# EAGLE board TekDAQC_RevC (EAGLE 6.2), part 1 of 4
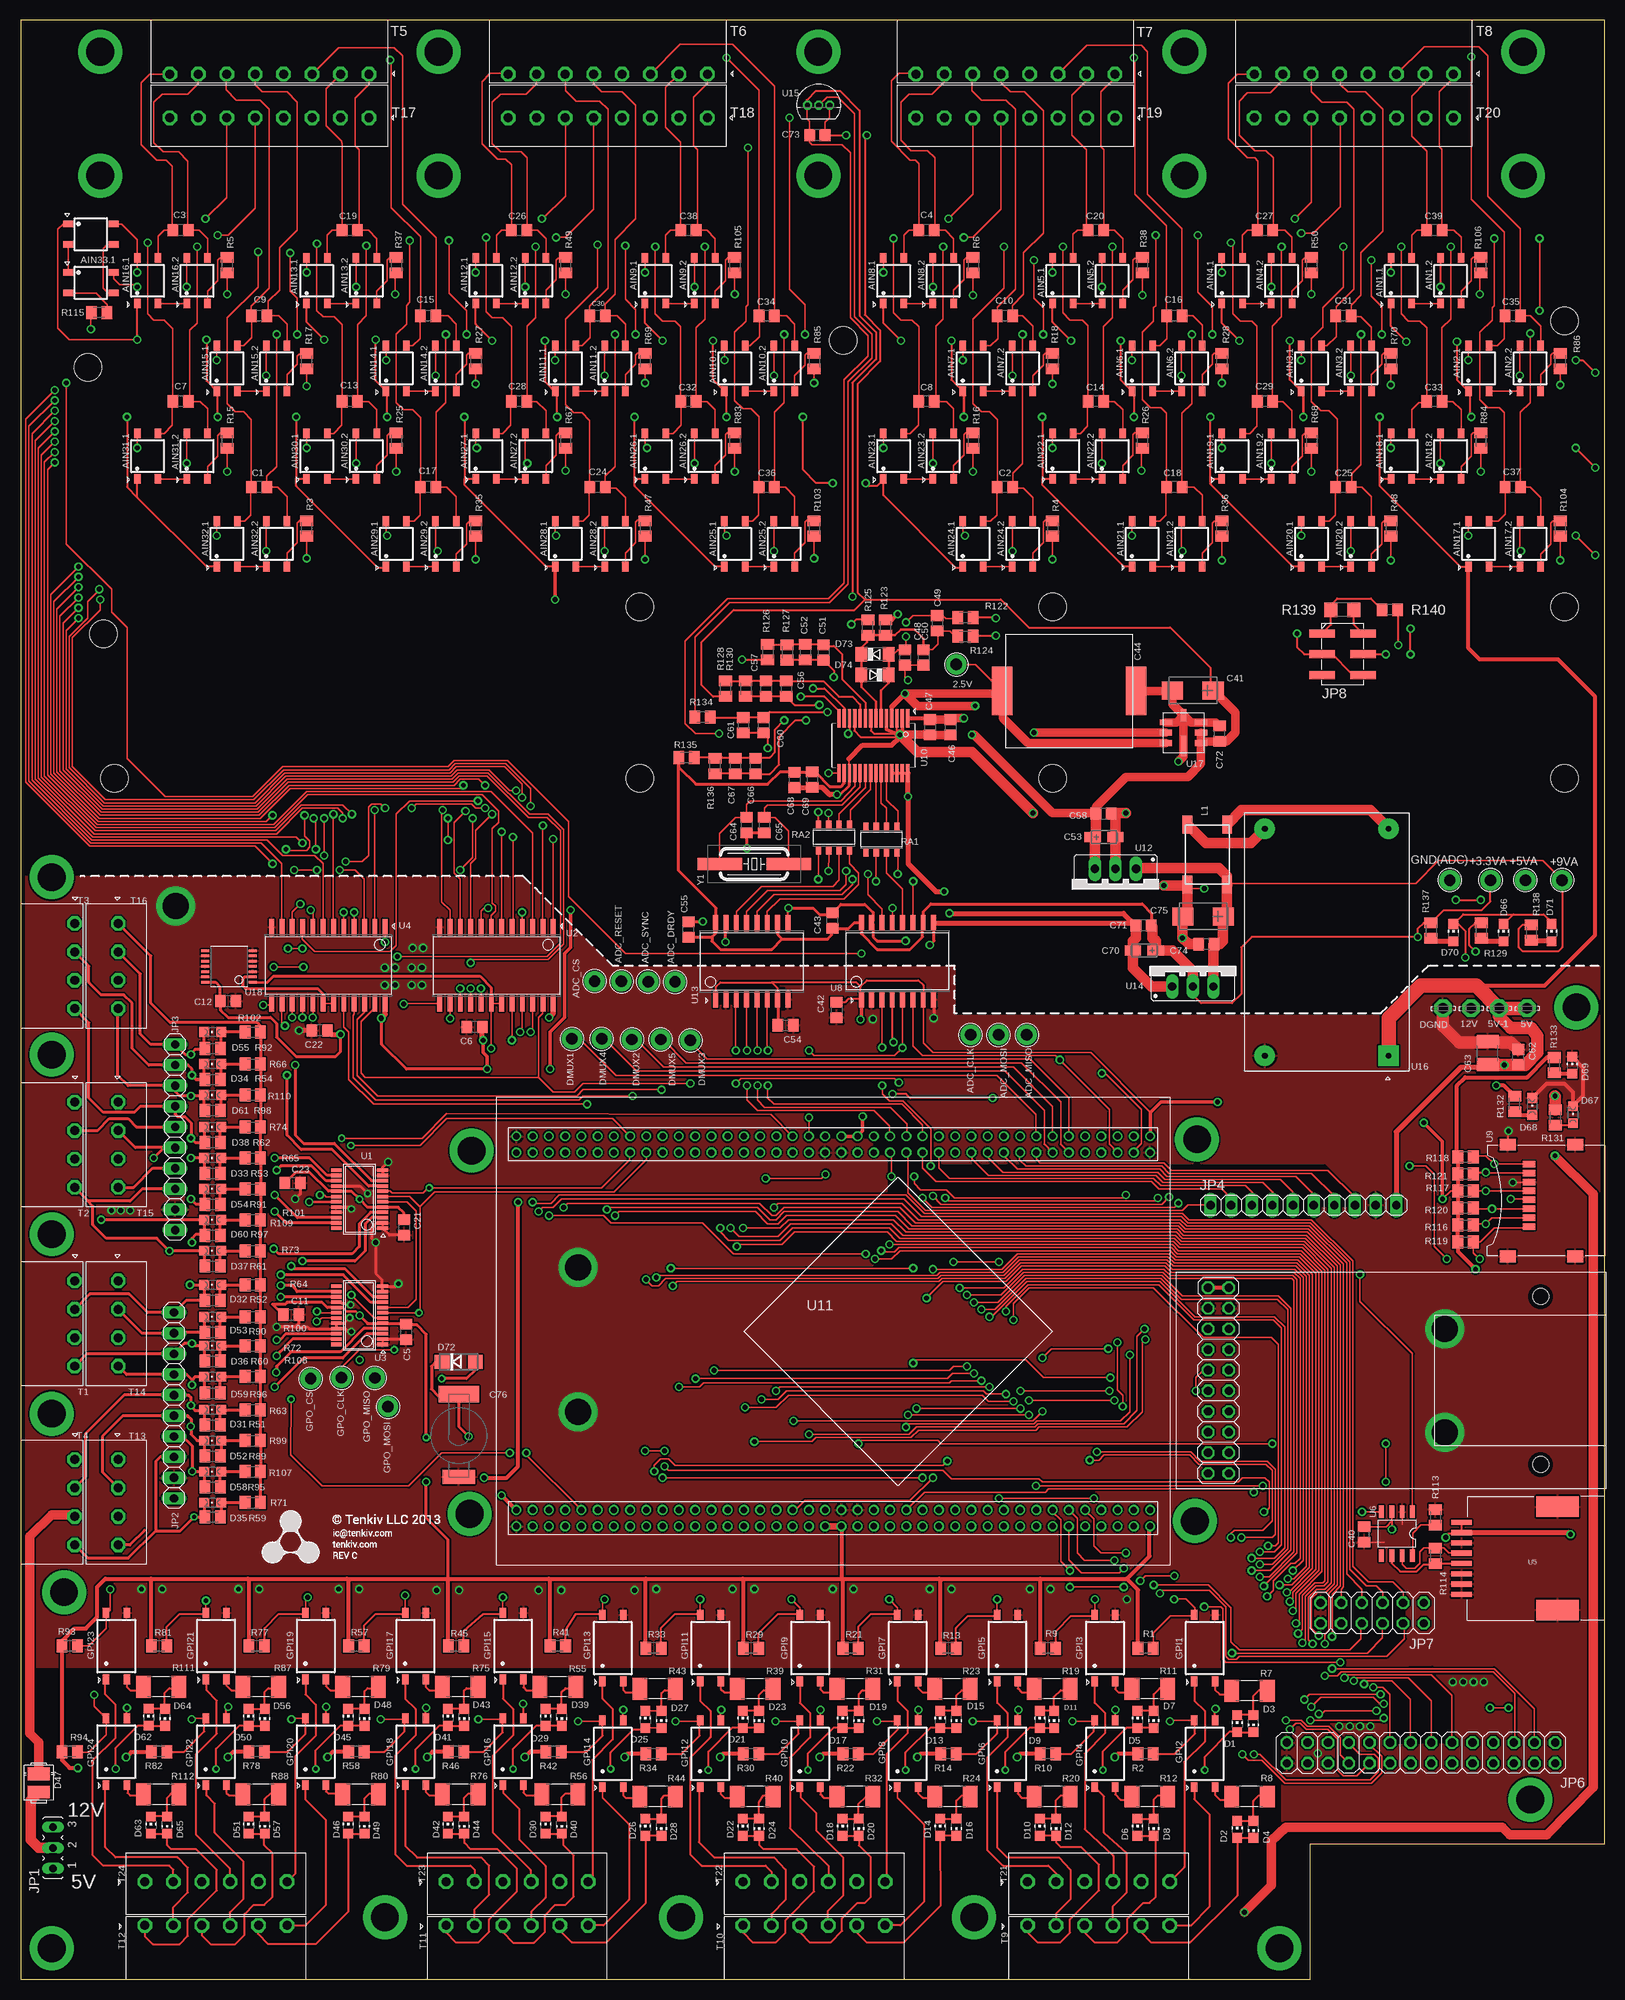
[diagram p0: board, top side]
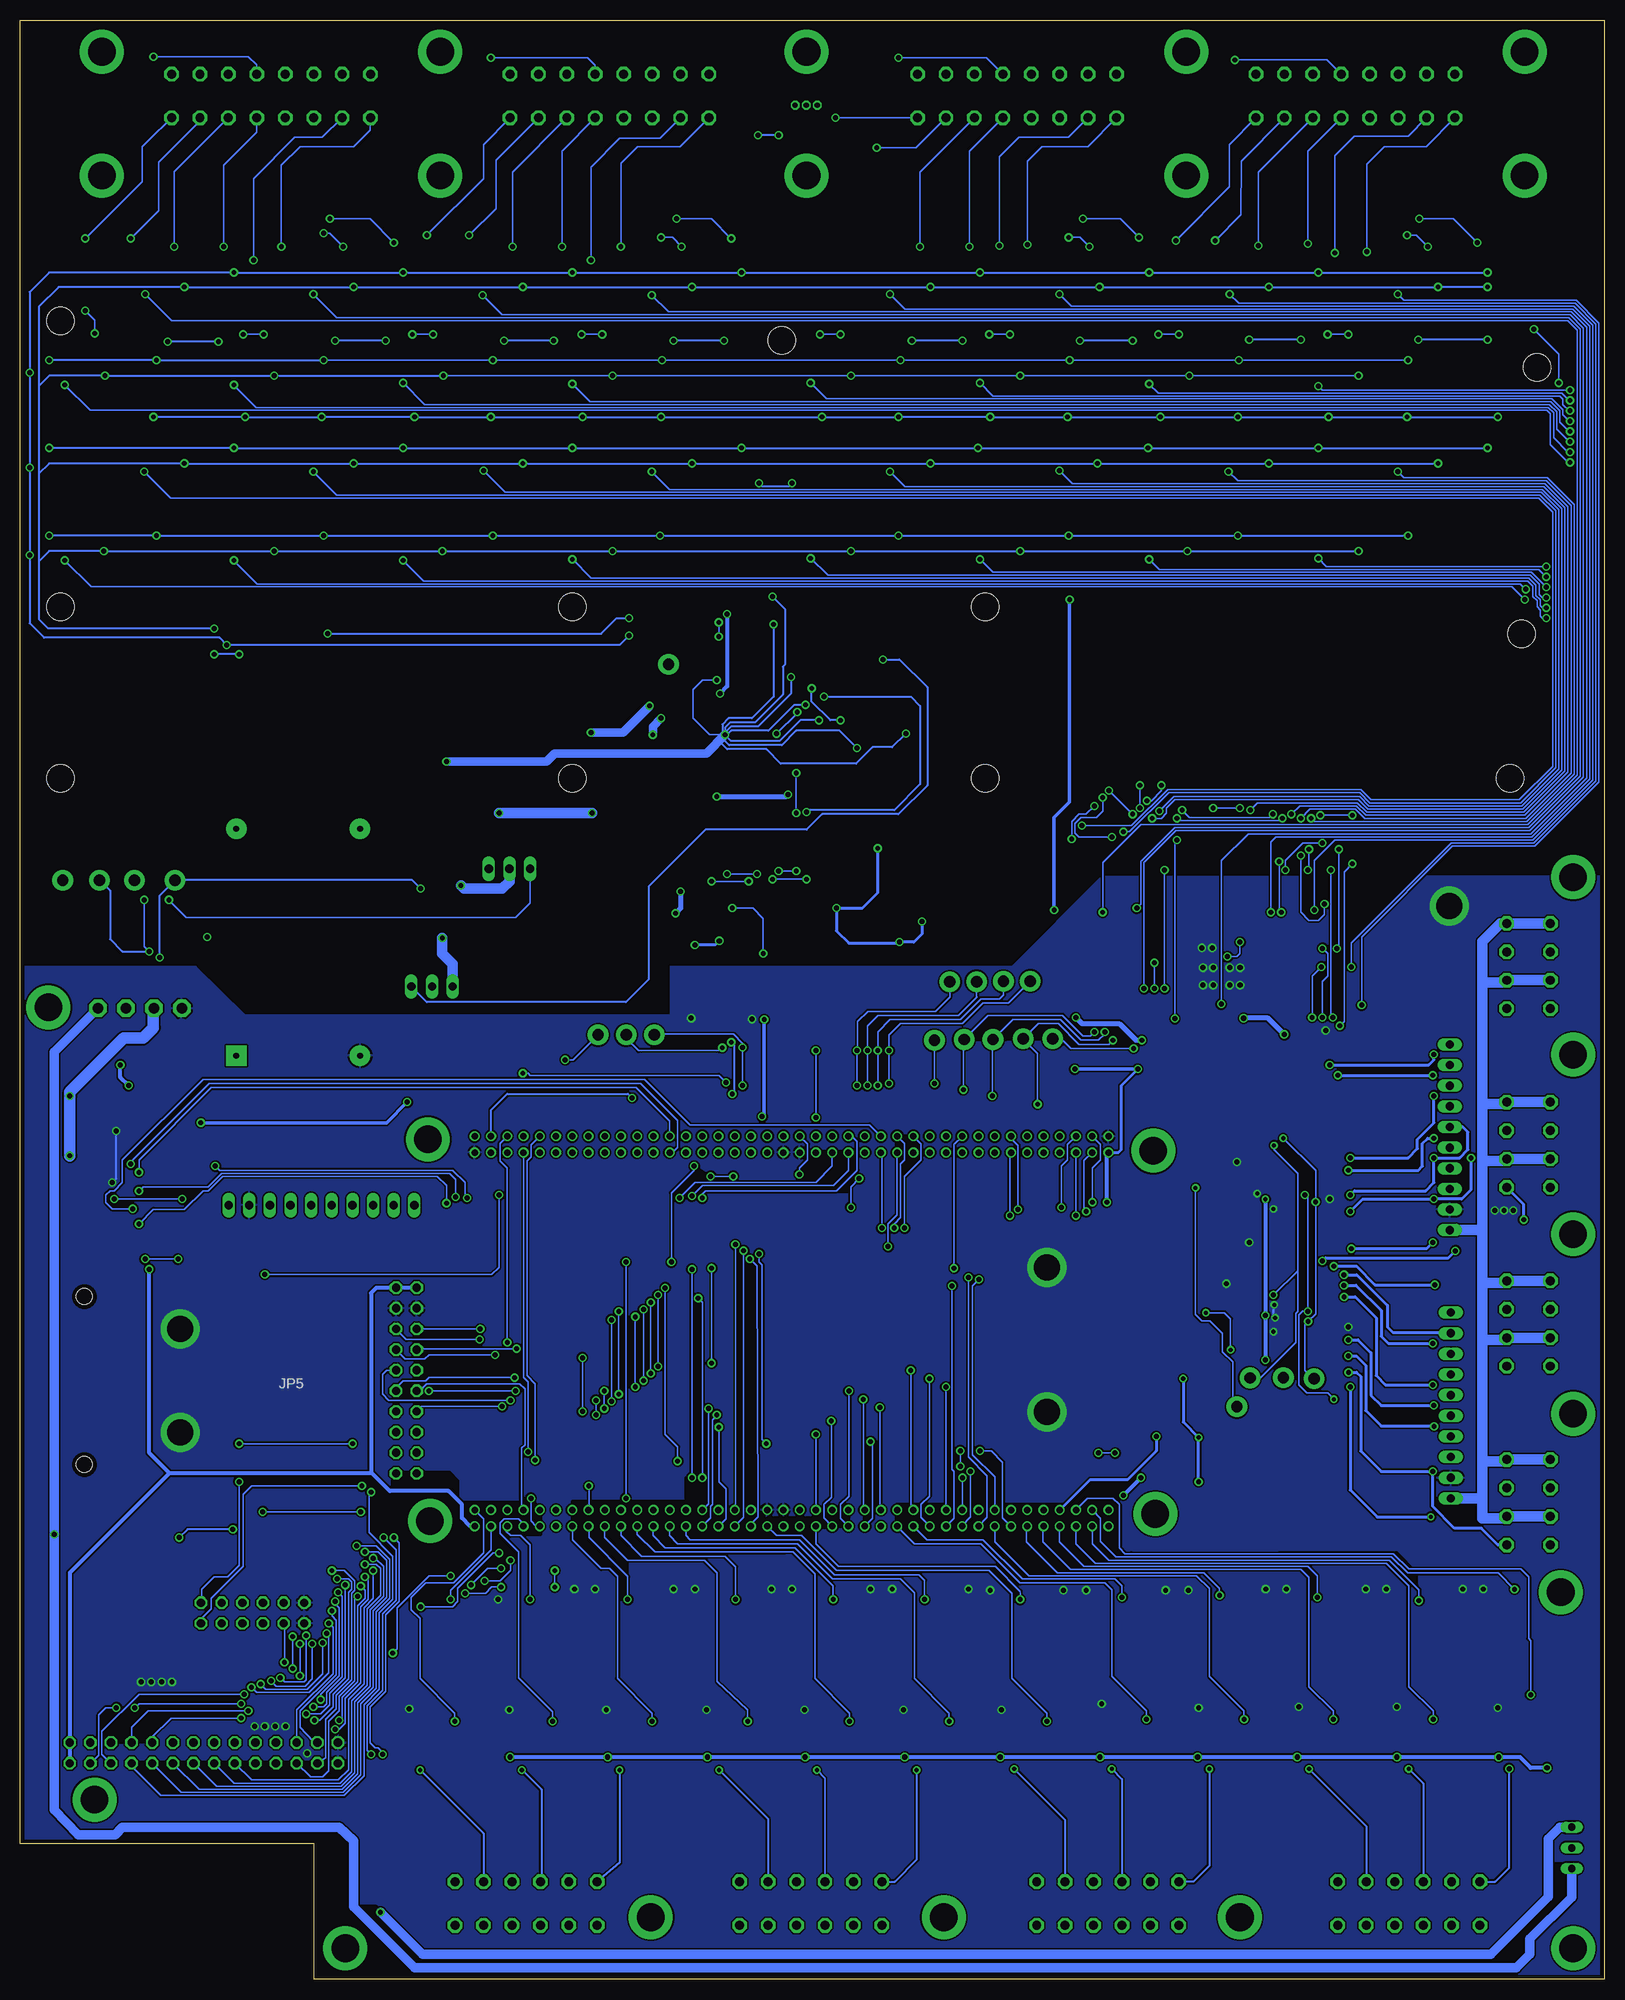
[diagram p1: board, bottom side, seen from below]

Size 194.94 x 241.1 mm. Coordinates in mm from the lower left corner, seen from the top.
Outline: 0,0 158.75,0 158.75,16.64 194.94,16.64 194.94,241.1 0,241.1 0,0
Copper layers (1*16): Top 0.0178mm / dielectric 59mil / Bottom 0.0178mm
Design rules: minimum track width 6mil, minimum drill 14mil, track to track 6mil, track to pad 6mil, pad to pad 6mil, via to via 6mil, smd to smd 6mil, copper to edge 20mil, drill to drill 16mil, minimum pad ring 8mil, minimum via ring 8mil, stop-mask expansion 3mil, vias tented up to drill 0mil, thermal gap 10mil
Net classes: 1 High Voltage: clearance 0.635 mm
Holes 3.4 mm at 76.2,168.91 101.22,201.68 189.99,204.09 189.99,168.91 8.26,198.37 10.16,165.61 11.56,147.83 127,168.91 189.99,147.83 76.2,147.83 127,147.83
tRestrict: area 0,16.5 to 154.9,38.1; area 148,38.1 to 154.9,39.4; area 165.1,29.1 to 176.3,38.4; area 160.3,39.6 to 170.3,49.5; area 168.5,50.5 to 172,53; area 132.5,63.8 to 146.2,65.9; area 85.3,114.3 to 94,122.7; area 103.4,112.8 to 112.3,122.9; area 97,103.6 to 111,107.7; area 105.2,93.2 to 164.3,103.6; 1 lines
bRestrict: area 3.8,1.4 to 14.1,14.2; area 23,48 to 27.4,52.5; area 154.9,22.9 to 181.6,26.7; area 167.5,29.1 to 184.9,35.1; area 152.9,59.8 to 168,62.2; area 141.1,53.6 to 149.1,62.4; area 130.9,54.7 to 141.1,59.3; area 100.8,46.7 to 127,61.7; area 59.7,49.7 to 87.1,58.4; area 97,55.8 to 103.1,56.8; area 93,55.6 to 97,57.1; area 90,55.8 to 91.1,57.9; area 67.9,115.6 to 78.9,118.6; area 85,101.6 to 87.1,103.8; area 91.8,96.3 to 114.8,101.9; area 143.5,1.3 to 153.7,8.9

## Footprints (pad centres in the part's own frame; a part is rotated, then mirrored left to right if it is on the bottom)
KEYSTONE_5000 = drill 1.4 pad 2.54: TP 0,0
LSP13 = drill 1.321 pad 2.159 octagon: MP 0,0
SOP4 = smd 0.8 x 1.2: 1 -1.27,-2.8; 2 1.27,-2.8; 3 1.27,2.8; 4 -1.27,2.8
C0805 = smd 1.3 x 1.5: 1 -0.95,0; 2 0.95,0
CT6032 = smd 2.6 x 2.2: + -2.5,0; - 2.5,0
6054 = smd 5.994 x 2.515: P$1 0,8.255; P$2 0,-8.255
CT3216 = smd 2 x 1.2: + -1.4,0; - 1.4,0
C1210 = smd 1.6 x 2.7: 1 -1.4,0; 2 1.4,0
COIN_CELL_CAP = smd 5.004 x 2.007: P$1 0,5.08 | smd 3.988 x 1.702: P$2 0,-5.08
CHIP-LED0805 = smd 1.2 x 1.2: A 0,-1.05; C 0,1.05
CHIPLED_0805 = smd 1.2 x 1.2: A 0,-1.05; C 0,1.05
DO−214AA = smd 1.59 x 2.734: 1 -1.131,0; 2 1.131,0
DO214AC = smd 1.8 x 1.7: A 2.05,0; C -2.05,0
SOD80C = smd 1.4 x 1.8: A 1.7,0; C -1.7,0
4-SMD = smd 0.8 x 1.2: 1 -1.27,-4.1; 2 1.27,-4.1; 3 1.27,4.1; 4 -1.27,4.1
JP2 = drill 0.914 long: 1 -2.54,0; 2 0,0; 3 2.54,0
1X10 = drill 1.016 long: 1 -11.43,0; 2 -8.89,0; 3 -6.35,0; 4 -3.81,0; 5 -1.27,0; 6 1.27,0; 7 3.81,0; 8 6.35,0; 9 8.89,0; 10 11.43,0
ETH_2X10 = drill 1.016 octagon: 1 -11.43,-1.27; 2 -11.43,1.27; 3 -8.89,-1.27; 4 -8.89,1.27; 5 -6.35,-1.27; 6 -6.35,1.27; 7 -3.81,-1.27; 8 -3.81,1.27; 9 -1.27,-1.27; 10 -1.27,1.27; 11 1.27,-1.27; 12 1.27,1.27; 13 3.81,-1.27; 14 3.81,1.27; 15 6.35,-1.27; 16 6.35,1.27; 17 8.89,-1.27; 18 8.89,1.27; 19 11.43,-1.27; 20 11.43,1.27 | hole 2: -10.338,39.649; 10.338,39.649
2X14 = drill 1.016 octagon: 1 -16.51,-1.27; 2 -16.51,1.27; 3 -13.97,-1.27; 4 -13.97,1.27; 5 -11.43,-1.27; 6 -11.43,1.27; 7 -8.89,-1.27; 8 -8.89,1.27; 9 -6.35,-1.27; 10 -6.35,1.27; 11 -3.81,-1.27; 12 -3.81,1.27; 13 -1.27,-1.27; 14 -1.27,1.27; 15 1.27,-1.27; 16 1.27,1.27; 17 3.81,-1.27; 18 3.81,1.27; 19 6.35,-1.27; 20 6.35,1.27; 21 8.89,-1.27; 22 8.89,1.27; 23 11.43,-1.27; 24 11.43,1.27; 25 13.97,-1.27; 26 13.97,1.27; 27 16.51,-1.27; 28 16.51,1.27
2X06 = drill 1.016 octagon: 1 -6.35,-1.27; 2 -6.35,1.27; 3 -3.81,-1.27; 4 -3.81,1.27; 5 -1.27,-1.27; 6 -1.27,1.27; 7 1.27,-1.27; 8 1.27,1.27; 9 3.81,-1.27; 10 3.81,1.27; 11 6.35,-1.27; 12 6.35,1.27
2X3SMT_HEADER = smd 3.15 x 0.991: P$1 -2.515,2.54; P$2 -2.515,0; P$3 -2.515,-2.54; P$4 2.515,-2.54; P$5 2.515,0; P$6 2.515,2.54
DR331_CHOKE = smd 2.21 x 1.194: P$1 -3.696,2.451; P$2 -3.696,-2.451; P$3 3.696,-2.451; P$4 3.696,2.451
M0805 = smd 1.3 x 1.6: 1 -0.95,0; 2 0.95,0
R2010 = smd 1.8 x 2.7: 1 -2.2,0; 2 2.2,0
R1206 = smd 1.6 x 1.803: 1 -1.422,0; 2 1.422,0
R0805 = smd 1.3 x 1.5: 1 -0.95,0; 2 0.95,0
5131(744SERIES) = smd 0.65 x 1: P$1 -1.905,-1.6; P$2 -0.635,-1.6; P$3 0.635,-1.6; P$4 1.905,-1.6; P$5 1.905,1.6; P$6 0.635,1.6; P$7 -0.635,1.6; P$8 -1.905,1.6
4POLE_3.5MM_TERMINAL_SIDE = drill 1.1 pad 1.778 octagon: 1 5.25,-2.625; 2 1.75,-2.625; 3 -1.75,-2.625; 4 -5.25,-2.625
8POLE_3.5MM_TERMINAL_SIDE = drill 1.1 pad 1.778 octagon: 1 12.25,-2.625; 2 8.75,-2.625; 3 5.25,-2.625; 4 1.75,-2.625; 5 -1.75,-2.625; 6 -5.25,-2.625; 7 -8.75,-2.625; 8 -12.25,-2.625
6POLE_3.5MM_TERMINAL_SIDE = drill 1.1 pad 1.778 octagon: 1 8.75,-2.625; 2 5.25,-2.625; 3 1.75,-2.625; 4 -1.75,-2.625; 5 -5.25,-2.625; 6 -8.75,-2.625
4POLE_3.5MM_TERMINAL_TOP = drill 1.1 pad 1.778 octagon: 1 5.25,0; 2 1.75,0; 3 -1.75,0; 4 -5.25,0
8POLE_3.5MM_TERMINAL_TOP = drill 1.1 pad 1.778 octagon: 1 12.25,0; 2 8.75,0; 3 5.25,0; 4 1.75,0; 5 -1.75,0; 6 -5.25,0; 7 -8.75,0; 8 -12.25,0
6POLE_3.5MM_TERMINAL_TOP = drill 1.1 pad 1.778 octagon: 1 8.75,0; 2 5.25,0; 3 1.75,0; 4 -1.75,0; 5 -5.25,0; 6 -8.75,0
SSOP24 = smd 0.44 x 1.31: 1 -3.575,-2.845; 2 -2.925,-2.845; 3 -2.275,-2.845; 4 -1.625,-2.845; 5 -0.975,-2.845; 6 -0.325,-2.845; 7 0.325,-2.845; 8 0.975,-2.845; 9 1.625,-2.845; 10 2.275,-2.845; 11 2.925,-2.845; 12 3.575,-2.845; 13 3.575,2.845; 14 2.925,2.845; 15 2.275,2.845; 16 1.625,2.845; 17 0.975,2.845; 18 0.325,2.845; 19 -0.325,2.845; 20 -0.975,2.845; 21 -1.625,2.845; 22 -2.275,2.845; 23 -2.925,2.845; 24 -3.575,2.845
SOIC24 = smd 0.6 x 2: 1 -6.985,-4.7; 2 -5.715,-4.7; 3 -4.445,-4.7; 4 -3.175,-4.7; 5 -1.905,-4.7; 6 -0.635,-4.7; 7 0.635,-4.7; 8 1.905,-4.7; 9 3.175,-4.7; 10 4.445,-4.7; 11 5.715,-4.7; 12 6.985,-4.7; 13 6.985,4.7; 14 5.715,4.7; 15 4.445,4.7; 16 3.175,4.7; 17 1.905,4.7; 18 0.635,4.7; 19 -0.635,4.7; 20 -1.905,4.7; 21 -3.175,4.7; 22 -4.445,4.7; 23 -5.715,4.7; 24 -6.985,4.7
44144 = smd 0.64 x 2.54: 1 4.44,17.58; 2 3.17,17.58; 3 1.9,17.58; 4 0.63,17.58; 5 -0.63,17.58; 6 -1.9,17.58; 7 -3.17,17.58; 8 -4.44,17.58 | smd 2.54 x 5.21: G1 6.35,5.785; G2 -6.35,5.785
MCP_SOIC = smd 0.6 x 1.55: 1 -1.905,-2.7; 2 -0.635,-2.7; 3 0.635,-2.7; 4 1.905,-2.7; 5 1.905,2.7; 6 0.635,2.7; 7 -0.635,2.7; 8 -1.905,2.7
SOIC16 = smd 0.6 x 2: 1 -4.445,-4.7; 2 -3.175,-4.7; 3 -1.905,-4.7; 4 -0.635,-4.7; 5 0.635,-4.7; 6 1.905,-4.7; 7 3.175,-4.7; 8 4.445,-4.7; 9 4.445,4.7; 10 3.175,4.7; 11 1.905,4.7; 12 0.635,4.7; 13 -0.635,4.7; 14 -1.905,4.7; 15 -3.175,4.7; 16 -4.445,4.7
TF-SD = smd 1.45 x 2: G1 6.875,-4.15; G2 6.875,4.15; G3 -6.875,4.15; G4 -6.875,-4.15 | smd 0.8 x 1.5: PIN1 3.205,-1.55; PIN2 2.105,-1.55; PIN3 1.005,-1.55; PIN4 -0.095,-1.55; PIN5 -1.195,-1.55; PIN6 -2.295,-1.55; PIN7 -3.395,-1.55; PIN8 -4.495,-1.55
SSOP28 = smd 0.4 x 2.261: 1 -4.225,-3.375; 2 -3.575,-3.375; 3 -2.925,-3.375; 4 -2.275,-3.375; 5 -1.625,-3.375; 6 -0.975,-3.375; 7 -0.325,-3.375; 8 0.325,-3.375; 9 0.975,-3.375; 10 1.625,-3.375; 11 2.275,-3.375; 12 2.925,-3.375; 13 3.575,-3.375; 14 4.225,-3.375; 15 4.225,3.375; 16 3.575,3.375; 17 2.925,3.375; 18 2.275,3.375; 19 1.625,3.375; 20 0.975,3.375; 21 0.325,3.375; 22 -0.325,3.375; 23 -0.975,3.375; 24 -1.625,3.375; 25 -2.275,3.375; 26 -2.925,3.375; 27 -3.575,3.375; 28 -4.225,3.375
STM32_CARRIER = drill 0.8: 3.3V-1 0.99,24; 3.3V-2 -1.01,24; 3.3V-3 -39.01,24; 3.3V-4 -1.01,-24; 3.3V-5 -3.01,-24; 3.3V-6 -39.01,-24; 5V-IN 38.99,22; 5V-IN/OUT 38.99,-22; BOOT0 28.99,-24; GND-1 38.99,24; GND-2 -1.01,22; GND-3 -3.01,22; GND-4 0.99,-22; GND-5 -1.01,-22; GND-6 -39.01,-22; GND-7 38.99,-24; PA0 4.99,22; PA1 4.99,24; PA2 2.99,22; PA3 -5.01,24; PA4 -7.01,22; PA5 -7.01,24; PA6 -9.01,22; PA7 -9.01,24; PA8 -13.01,-24; PA9 -13.01,-22; PA10 -11.01,-24; PA11 -11.01,-22; PA12 -9.01,-24; PA13 -9.01,-22; PA14 2.99,-22; PA15 4.99,-24; PB0 -13.01,22; PB1 -13.01,24; PB2 -15.01,22; PB3 22.99,-22; PB4 24.99,-24; PB5 24.99,-22; PB6 26.99,-24; PB7 26.99,-22; PB8 28.99,-22; PB9 30.99,-24; PB10 -31.01,24; PB11 -33.01,22; PB12 -37.01,-22; PB13 -35.01,-24; PB14 -35.01,-22; PB15 -33.01,-24; PC0 10.99,22; PC1 8.99,24; PC2 8.99,22; PC3 6.99,24; PC4 -11.01,22; PC5 -11.01,24; PC6 -17.01,-24; PC7 -17.01,-22; PC8 -15.01,-24; PC9 -15.01,-22; PC10 4.99,-22; PC11 6.99,-24; PC12 6.99,-22; PC13 30.99,22; PC14 28.99,24; PC15 28.99,22; PD0 8.99,-24; PD1 8.99,-22; PD2 10.99,-24; PD3 10.99,-22; PD4 12.99,-24; PD5 12.99,-22; PD6 14.99,-24; PD7 14.99,-22; PD8 -33.01,-22; PD9 -31.01,-24; PD10 -31.01,-22; PD11 -29.01,-24; PD12 -29.01,-22; PD13 -27.01,-24; PD14 -27.01,-22; PD15 -25.01,-24; PDR 32.99,-22; PE0 30.99,-22; PE1 32.99,-24; PE2 36.99,24; PE3 36.99,22; PE4 34.99,24; PE5 34.99,22; PE6 32.99,24; PE7 -23.01,22; PE8 -23.01,24; PE9 -25.01,22; PE10 -25.01,24; PE11 -27.01,22; PE12 -27.01,24; PE13 -29.01,22; PE14 -29.01,24; PE15 -31.01,22; PF0 24.99,22; PF1 22.99,24; PF2 22.99,22; PF3 20.99,24; PF4 20.99,22; PF5 18.99,24; PF6 18.99,22; PF7 16.99,24; PF8 16.99,22; PF9 14.99,24; PF10 14.99,22; PF11 -15.01,24; PF12 -17.01,22; PF13 -17.01,24; PF14 -19.01,22; PF15 -19.01,24; PG0 -21.01,22; PG1 -21.01,24; PG2 -25.01,-22; PG3 -23.01,-24; PG4 -23.01,-22; PG5 -21.01,-24; PG6 -21.01,-22; PG7 -19.01,-24; PG8 -19.01,-22; PG9 16.99,-24; PG10 16.99,-22; PG11 18.99,-24; PG12 18.99,-22; PG13 20.99,-24; PG14 20.99,-22; PG15 22.99,-24; PH0 12.99,24; PH1 12.99,22; PH2 2.99,24; PH3 0.99,22; PH4 -3.01,24; PH5 -5.01,22; PH6 -33.01,24; PH7 -35.01,22; PH8 -35.01,24; PH9 -37.01,22; PH10 -37.01,24; PH11 -39.01,22; PH12 -37.01,-24; PH13 -7.01,-22; PH14 -7.01,-24; PH15 -5.01,-22; PI0 -5.01,-24; PI1 -3.01,-22; PI2 0.99,-24; PI3 2.99,-24; PI4 34.99,-24; PI5 34.99,-22; PI6 36.99,-24; PI7 36.99,-22; PI8 30.99,24; PI9 26.99,24; PI10 26.99,22; PI11 24.99,24; RST 10.99,24; VBAT 32.99,22; VREF+ 6.99,22
78XXS = drill 1.016 long: GND 0,-2.54; IN -2.54,-2.54; OUT 2.54,-2.54
317TS = drill 1.016 long: 1 -2.54,-2.54; 2 0,-2.54; 3 2.54,-2.54
TO-92 = drill 0.65 octagon: 1 -1.37,0; 2 0,0; 3 1.37,0
DIL24(4PIN) = drill 0.7 pad 2.54 square: 1 -13.97,-7.62 | drill 0.7 pad 2.54: 12 13.97,-7.62; 13 13.97,7.62; 24 -13.97,7.62
CLCC8 = smd 1.499 x 0.711: P$1 -2.159,1.27; P$2 -2.159,0; P$3 -2.159,-1.27; P$5 2.159,-1.27; P$6 2.159,0; P$7 2.159,1.27 | smd 0.711 x 1.499: P$4 0,-2.159 | smd 0.711 x 2.489: P$8 0,1.651
TSSOP14 = smd 0.305 x 0.991: 1 -1.95,-2.918; 2 -1.3,-2.918; 3 -0.65,-2.918; 4 0,-2.918; 5 0.65,-2.918; 6 1.3,-2.918; 7 1.95,-2.918; 8 1.95,2.918; 9 1.3,2.918; 10 0.65,2.918; 11 0,2.918; 12 -0.65,2.918; 13 -1.3,2.918; 14 -1.95,2.918
HCM49 = smd 5.5 x 1.5: P$1 4.25,0; P$2 -4.25,0

## Placement (x,y rotation side)
2.5V  R  [KEYSTONE_5000]  115.16,161.81 0 top
5V  LSP13  [LSP13]  185.4,119.49 0 top
5V-1  LSP13  [LSP13]  181.95,119.49 0 top
12V  LSP13  [LSP13]  178.51,119.49 0 top
+3.3VA  R  [KEYSTONE_5000]  180.91,135.27 0 top
+5VA  R  [KEYSTONE_5000]  185.2,135.27 0 top
+9VA  R  [KEYSTONE_5000]  189.72,135.27 0 top
ADC_CLK  Y  [KEYSTONE_5000]  116.91,116.22 0 top
ADC_CS  Y  [KEYSTONE_5000]  70.63,122.85 0 top
ADC_DRDY  Y  [KEYSTONE_5000]  80.54,122.75 0 top
ADC_MISO  B  [KEYSTONE_5000]  123.83,116.22 0 top
ADC_MOSI  W  [KEYSTONE_5000]  120.37,116.22 0 top
ADC_RESET  W  [KEYSTONE_5000]  73.93,122.81 0 top
ADC_SYNC  O  [KEYSTONE_5000]  77.23,122.78 0 top
AIN1.1  CPC1025N  [SOP4]  169.93,209.04 0 top
AIN1.2  CPC1025N  [SOP4]  176.02,209.04 0 top
AIN2.1  CPC1025N  [SOP4]  179.45,198.25 0 top
AIN2.2  CPC1025N  [SOP4]  185.8,198.25 0 top
AIN3.1  CPC1025N  [SOP4]  158.88,198.25 0 top
AIN3.2  CPC1025N  [SOP4]  164.97,198.25 0 top
AIN4.1  CPC1025N  [SOP4]  149.1,209.04 0 top
AIN4.2  CPC1025N  [SOP4]  155.19,209.04 0 top
AIN5.1  CPC1025N  [SOP4]  128.27,209.04 0 top
AIN5.2  CPC1025N  [SOP4]  134.37,209.04 0 top
AIN6.1  CPC1025N  [SOP4]  138.05,198.25 0 top
AIN6.2  CPC1025N  [SOP4]  144.15,198.25 0 top
AIN7.1  CPC1025N  [SOP4]  117.22,198.25 0 top
AIN7.2  CPC1025N  [SOP4]  123.32,198.25 0 top
AIN8.1  CPC1025N  [SOP4]  107.44,209.04 0 top
AIN8.2  CPC1025N  [SOP4]  113.54,209.04 0 top
AIN9.1  CPC1025N  [SOP4]  78.11,209.04 0 top
AIN9.2  CPC1025N  [SOP4]  84.2,209.04 0 top
AIN10.1  CPC1025N  [SOP4]  87.88,198.25 0 top
AIN10.2  CPC1025N  [SOP4]  93.98,198.25 0 top
AIN11.1  CPC1025N  [SOP4]  67.06,198.25 0 top
AIN11.2  CPC1025N  [SOP4]  73.15,198.25 0 top
AIN12.1  CPC1025N  [SOP4]  57.28,209.04 0 top
AIN12.2  CPC1025N  [SOP4]  63.37,209.04 0 top
AIN13.1  CPC1025N  [SOP4]  36.45,209.04 0 top
AIN13.2  CPC1025N  [SOP4]  42.55,209.04 0 top
AIN14.1  CPC1025N  [SOP4]  46.23,198.25 0 top
AIN14.2  CPC1025N  [SOP4]  52.32,198.25 0 top
AIN15.1  CPC1025N  [SOP4]  25.4,198.25 0 top
AIN15.2  CPC1025N  [SOP4]  31.5,198.25 0 top
AIN16.1  CPC1025N  [SOP4]  15.62,209.04 0 top
AIN16.2  CPC1025N  [SOP4]  21.72,209.04 0 top
AIN17.1  CPC1025N  [SOP4]  179.45,176.66 0 top
AIN17.2  CPC1025N  [SOP4]  185.8,176.66 0 top
AIN18.1  CPC1025N  [SOP4]  169.93,187.45 0 top
AIN18.2  CPC1025N  [SOP4]  176.02,187.45 0 top
AIN19.1  CPC1025N  [SOP4]  149.1,187.45 0 top
AIN19.2  CPC1025N  [SOP4]  155.19,187.45 0 top
AIN20.1  CPC1025N  [SOP4]  158.88,176.66 0 top
AIN20.2  CPC1025N  [SOP4]  164.97,176.66 0 top
AIN21.1  CPC1025N  [SOP4]  138.05,176.66 0 top
AIN21.2  CPC1025N  [SOP4]  144.15,176.66 0 top
AIN22.1  CPC1025N  [SOP4]  128.27,187.45 0 top
AIN22.2  CPC1025N  [SOP4]  134.37,187.45 0 top
AIN23.1  CPC1025N  [SOP4]  107.44,187.45 0 top
AIN23.2  CPC1025N  [SOP4]  113.54,187.45 0 top
AIN24.1  CPC1025N  [SOP4]  117.22,176.66 0 top
AIN24.2  CPC1025N  [SOP4]  123.32,176.66 0 top
AIN25.1  CPC1025N  [SOP4]  87.88,176.66 0 top
AIN25.2  CPC1025N  [SOP4]  93.98,176.66 0 top
AIN26.1  CPC1025N  [SOP4]  78.11,187.45 0 top
AIN26.2  CPC1025N  [SOP4]  84.2,187.45 0 top
AIN27.1  CPC1025N  [SOP4]  57.28,187.45 0 top
AIN27.2  CPC1025N  [SOP4]  63.37,187.45 0 top
AIN28.1  CPC1025N  [SOP4]  67.06,176.66 0 top
AIN28.2  CPC1025N  [SOP4]  73.15,176.66 0 top
AIN29.1  CPC1025N  [SOP4]  46.23,176.66 0 top
AIN29.2  CPC1025N  [SOP4]  52.32,176.66 0 top
AIN30.1  CPC1025N  [SOP4]  36.45,187.45 0 top
AIN30.2  CPC1025N  [SOP4]  42.55,187.45 0 top
AIN31.1  CPC1025N  [SOP4]  15.62,187.45 0 top
AIN31.2  CPC1025N  [SOP4]  21.72,187.45 0 top
AIN32.1  CPC1025N  [SOP4]  25.4,176.66 0 top
AIN32.2  CPC1025N  [SOP4]  31.5,176.66 0 top
AIN33.1  CPC1025N  [SOP4]  8.64,208.79 270 top
AIN33.2  CPC1025N  [SOP4]  8.64,214.76 270 top
C1  0.1uF  [C0805]  29.34,183.64 180 top
C2  0.1uF  [C0805]  121.16,183.64 180 top
C3  0.1uF  [C0805]  19.68,215.26 180 top
C4  0.1uF  [C0805]  111.51,215.26 180 top
C5  0.1uF  [C0805]  47.43,79.68 270 top
C6  0.1uF  [C0805]  55.85,117.19 180 top
C7  0.1uF  [C0805]  19.68,194.18 180 top
C8  0.1uF  [C0805]  111.51,194.18 180 top
C9  0.1uF  [C0805]  29.34,204.72 180 top
C10  0.1uF  [C0805]  121.16,204.72 180 top
C11  0.1uF  [C0805]  33.27,81.79 0 top
C12  0.1uF  [C0805]  25.53,120.4 0 top
C13  0.1uF  [C0805]  40.51,194.18 180 top
C14  0.1uF  [C0805]  132.33,194.18 180 top
C15  0.1uF  [C0805]  50.16,204.72 180 top
C16  0.1uF  [C0805]  141.99,204.72 180 top
C17  0.1uF  [C0805]  50.16,183.64 180 top
C18  0.1uF  [C0805]  141.99,183.64 180 top
C19  0.1uF  [C0805]  40.51,215.26 180 top
C20  0.1uF  [C0805]  132.33,215.26 180 top
C21  0.1uF  [C0805]  47.19,92.54 270 top
C22  0.1uF  [C0805]  36.78,116.78 180 top
C23  0.1uF  [C0805]  33.46,98 0 top
C24  0.1uF  [C0805]  70.99,183.64 180 top
C25  0.1uF  [C0805]  162.81,183.64 180 top
C26  0.1uF  [C0805]  61.34,215.26 180 top
C27  0.1uF  [C0805]  153.16,215.26 180 top
C28  0.1uF  [C0805]  61.34,194.18 180 top
C29  0.1uF  [C0805]  153.16,194.18 180 top
C30  0.1uF  [C0805]  70.99,204.72 180 top
C31  0.1uF  [C0805]  162.81,204.72 180 top
C32  0.1uF  [C0805]  82.17,194.18 180 top
C33  0.1uF  [C0805]  173.99,194.18 180 top
C34  0.1uF  [C0805]  91.82,204.72 180 top
C35  0.1uF  [C0805]  183.64,204.72 180 top
C36  0.1uF  [C0805]  91.82,183.64 180 top
C37  0.1uF  [C0805]  183.64,183.64 180 top
C38  0.1uF  [C0805]  82.17,215.26 180 top
C39  0.1uF  [C0805]  173.99,215.26 180 top
C40  0.1uF  [C0805]  165.35,54.74 90 top
C41  10uF  [CT6032]  144.27,158.62 180 top
C42  0.1uF  [C0805]  100.41,119.29 270 top
C43  0.1uF  [C0805]  99.91,130.29 90 top
C44  4.7uF  [6054]  129.05,158.56 90 top
C46  0.1uF  [C0805]  114.42,154.08 270 top
C47  10uF  [C0805]  111.92,154.08 270 top
C48  0.01uF  [C0805]  108.84,162.69 270 top
C49  0.1uF  [C0805]  112.81,166.88 270 top
C50  0.01uF  [C0805]  111.12,162.69 270 top
C51  100pF  [C0805]  98.8,163.31 270 top
C52  0.1uF  [C0805]  96.57,163.32 270 top
C53  15uF  [CT3216]  133.35,140.59 0 top
C54  0.1uF  [C0805]  94.14,117.41 0 top
C55  0.1uF  [C0805]  82.2,129.21 90 top
C56  100pF  [C0805]  94.23,158.83 270 top
C57  0.1uF  [C0805]  91.73,158.83 270 top
C58  0.1uF  [C0805]  133.29,143.45 0 top
C60  100pF  [C0805]  91.44,154.33 270 top
C61  0.1uF  [C0805]  88.94,154.33 270 top
C62  0.1uF  [C0805]  184.32,113.48 90 top
C63  47uF  [C1210]  180.56,113.98 90 top
C64  18pF  [C0805]  89.32,142.05 270 top
C65  18pF  [C0805]  91.52,142.07 270 top
C66  100pF  [C0805]  90.44,149.33 270 top
C67  0.1uF  [C0805]  87.94,149.33 270 top
C68  0.1uF  [C0805]  95.24,147.62 270 top
C69  10uF  [C0805]  97.42,147.64 270 top
C70  15uF  [CT3216]  138.3,126.62 180 top
C71  0.1uF  [C0805]  138.21,129.68 180 top
C72  0.1uF  [C0805]  147.57,153.29 90 top
C73  0.1uF  [C0805]  98.04,226.95 180 top
C74  0.1uF  [C0805]  145.92,127.38 180 top
C75  10uF  [CT6032]  145.54,130.81 180 top
C76  ELNA0_0.33F_CAP  [COIN_CELL_CAP]  53.91,66.92 0 top
D1  R  [CHIP-LED0805]  149.73,31.46 0 top
D2  R  [CHIP-LED0805]  149.73,18.46 0 top
D3  R  [CHIP-LED0805]  151.73,31.46 180 top
D4  R  [CHIP-LED0805]  151.73,18.46 180 top
D5  R  [CHIP-LED0805]  137.46,31.97 0 top
D6  R  [CHIP-LED0805]  137.46,18.71 0 top
D7  R  [CHIP-LED0805]  139.46,31.97 180 top
D8  R  [CHIP-LED0805]  139.46,18.71 180 top
D9  R  [CHIP-LED0805]  125.44,31.97 0 top
D10  R  [CHIP-LED0805]  125.44,18.71 0 top
D11  R  [CHIP-LED0805]  127.19,31.97 180 top
D12  R  [CHIP-LED0805]  127.44,18.71 180 top
D13  R  [CHIP-LED0805]  113.17,31.97 0 top
D14  R  [CHIP-LED0805]  113.17,18.71 0 top
D15  R  [CHIP-LED0805]  115.17,31.97 180 top
D16  R  [CHIP-LED0805]  115.17,18.71 180 top
D17  R  [CHIP-LED0805]  101.16,31.97 0 top
D18  R  [CHIP-LED0805]  101.16,18.71 0 top
D19  R  [CHIP-LED0805]  103.16,31.97 180 top
D20  R  [CHIP-LED0805]  103.16,18.71 180 top
D21  R  [CHIP-LED0805]  88.89,31.97 0 top
D22  R  [CHIP-LED0805]  88.89,18.71 0 top
D23  R  [CHIP-LED0805]  90.89,31.97 180 top
D24  R  [CHIP-LED0805]  90.89,18.71 180 top
D25  R  [CHIP-LED0805]  76.87,31.97 0 top
D26  R  [CHIP-LED0805]  76.87,18.71 0 top
D27  R  [CHIP-LED0805]  78.87,31.97 180 top
D28  R  [CHIP-LED0805]  78.87,18.71 180 top
D29  R  [CHIP-LED0805]  64.6,32.22 0 top
D30  R  [CHIP-LED0805]  64.6,18.97 0 top
D31  B  [CHIPLED_0805]  23.62,70.1 90 top
D32  B  [CHIPLED_0805]  23.62,85.46 90 top
D33  B  [CHIPLED_0805]  23.62,101.08 90 top
D34  B  [CHIPLED_0805]  23.62,112.64 90 top
D35  B  [CHIPLED_0805]  23.62,58.67 90 top
D36  B  [CHIPLED_0805]  23.62,77.97 90 top
D37  B  [CHIPLED_0805]  23.62,89.65 90 top
D38  B  [CHIPLED_0805]  23.62,104.89 90 top
D39  R  [CHIP-LED0805]  66.6,32.22 180 top
D40  R  [CHIP-LED0805]  66.6,18.97 180 top
D41  R  [CHIP-LED0805]  52.59,32.22 0 top
D42  R  [CHIP-LED0805]  52.59,18.97 0 top
D43  R  [CHIP-LED0805]  54.59,32.22 180 top
D44  R  [CHIP-LED0805]  54.59,18.97 180 top
D45  R  [CHIP-LED0805]  40.32,32.22 0 top
D46  R  [CHIP-LED0805]  40.32,18.97 0 top
D47  DIODE(DO-214AA)  [DO−214AA]  2.22,24.16 90 top
D48  R  [CHIP-LED0805]  42.32,32.22 180 top
D49  R  [CHIP-LED0805]  42.32,18.97 180 top
D50  R  [CHIP-LED0805]  28.05,32.22 0 top
D51  R  [CHIP-LED0805]  28.05,18.97 0 top
D52  B  [CHIPLED_0805]  23.62,66.29 90 top
D53  B  [CHIPLED_0805]  23.62,81.53 90 top
D54  B  [CHIPLED_0805]  23.62,97.27 90 top
D55  B  [CHIPLED_0805]  23.62,116.57 90 top
D56  R  [CHIP-LED0805]  30.05,32.22 180 top
D57  R  [CHIP-LED0805]  30.05,18.97 180 top
D58  B  [CHIPLED_0805]  23.62,62.48 90 top
D59  B  [CHIPLED_0805]  23.62,74.16 90 top
D60  B  [CHIPLED_0805]  23.62,93.46 90 top
D61  B  [CHIPLED_0805]  23.62,108.83 90 top
D62  R  [CHIP-LED0805]  15.75,32.26 0 top
D63  R  [CHIP-LED0805]  16.03,18.97 0 top
D64  R  [CHIP-LED0805]  17.78,32.22 180 top
D65  R  [CHIP-LED0805]  18.03,18.97 180 top
D66  +5V  [CHIP-LED0805]  182.51,128.81 0 top
D67  +12V  [CHIPLED_0805]  191.06,106.4 0 top
D68  +5V  [CHIPLED_0805]  186.04,107.41 0 top
D69  MCU PWR  [CHIP-LED0805]  190.97,112.49 0 top
D70  +3.3V  [CHIP-LED0805]  176.34,128.81 0 top
D71  +9V  [CHIP-LED0805]  188.43,128.81 0 top
D72  CDBA120LL-G  [DO214AC]  53.91,75.97 0 top
D73  TZMC5V1-GS08  [SOD80C]  105.16,163.07 0 top
D74  TZMC5V1-GS08  [SOD80C]  105.16,160.53 180 top
DGND  LSP13  [LSP13]  175.07,119.49 0 top
DMUX1  O  [KEYSTONE_5000]  67.86,115.75 0 top
DMUX2  O  [KEYSTONE_5000]  75.23,115.66 0 top
DMUX3  O  [KEYSTONE_5000]  82.43,115.56 0 top
DMUX4  O  [KEYSTONE_5000]  71.5,115.75 0 top
DMUX5  O  [KEYSTONE_5000]  78.78,115.66 0 top
DRILEGEND  [DRILEGEND]  -0.06,-3.87 0 top  (outside the outline)
GND(ADC)  B  [KEYSTONE_5000]  175.9,135.27 0 top
GPI1  [4-SMD]  145.73,40.75 0 top
GPI2  [4-SMD]  145.73,27.75 0 top
GPI3  [4-SMD]  133.46,40.75 0 top
GPI4  [4-SMD]  133.46,27.75 0 top
GPI5  [4-SMD]  121.44,40.75 0 top
GPI6  [4-SMD]  121.44,27.75 0 top
GPI7  [4-SMD]  109.17,40.75 0 top
GPI8  [4-SMD]  109.17,27.75 0 top
GPI9  [4-SMD]  97.16,40.75 0 top
GPI10  [4-SMD]  97.16,27.75 0 top
GPI11  [4-SMD]  84.89,40.75 0 top
GPI12  [4-SMD]  84.89,27.75 0 top
GPI13  [4-SMD]  72.87,40.75 0 top
GPI14  [4-SMD]  72.87,27.75 0 top
GPI15  [4-SMD]  60.6,41 0 top
GPI16  [4-SMD]  60.6,28 0 top
GPI17  [4-SMD]  48.59,41 0 top
GPI18  [4-SMD]  48.59,28 0 top
GPI19  [4-SMD]  36.32,41 0 top
GPI20  [4-SMD]  36.32,28 0 top
GPI21  [4-SMD]  24.05,41 0 top
GPI22  [4-SMD]  24.05,28 0 top
GPI23  [4-SMD]  11.78,41 0 top
GPI24  [4-SMD]  11.78,28 0 top
GPO_CLK  Y  [KEYSTONE_5000]  39.49,74.02 0 top
GPO_CS  Y  [KEYSTONE_5000]  35.68,73.9 0 top
GPO_MISO  B  [KEYSTONE_5000]  43.59,74.01 0 top
GPO_MOSI  W  [KEYSTONE_5000]  45.21,70.46 0 top
JP1  OutputSupply  [JP2]  3.98,16.16 90 top
JP2  Relay2  [1X10]  18.87,70.62 270 top
JP3  Relay1  [1X10]  19,103.62 270 top
JP4  Relay1  [1X10]  157.88,95.26 0 top
JP5  ETH Header  [ETH_2X10]  147.43,73.69 270 top
JP6  Misc Header  [2X14]  172.36,27.85 180 top
JP7  PWM Header  [2X06]  166.35,45.06 180 top
JP8  2X3PIN_SMT_HEADER  [2X3SMT_HEADER]  162.69,163.07 0 top
L1  BOURNES_DR331-475BE  [DR331_CHOKE]  146.05,138.43 270 top
R1  1k  [M0805]  138.46,40.75 0 top
R2  1k  [M0805]  138.46,27.75 0 top
R3  442  [M0805]  35.18,178.56 90 top
R4  442  [M0805]  127,178.56 90 top
R5  442  [M0805]  25.4,210.95 90 top
R6  442  [M0805]  117.22,210.95 90 top
R7  330  [R2010]  151.24,35.48 180 top
R8  330  [R2010]  151.24,22.48 180 top
R9  1k  [M0805]  126.44,40.75 0 top
R10  1k  [M0805]  126.44,27.75 0 top
R11  330  [R2010]  138.97,35.73 180 top
R12  330  [R2010]  138.97,22.48 180 top
R13  1k  [M0805]  114.17,40.75 0 top
R14  1k  [M0805]  114.17,27.75 0 top
R15  442  [M0805]  25.4,189.36 90 top
R16  442  [M0805]  117.22,189.36 90 top
R17  442  [M0805]  35.18,199.14 90 top
R18  442  [M0805]  127,199.14 90 top
R19  330  [R2010]  126.95,35.73 180 top
R20  330  [R2010]  126.95,22.48 180 top
R21  1k  [M0805]  102.16,40.75 0 top
R22  1k  [M0805]  102.16,27.75 0 top
R23  330  [R2010]  114.68,35.73 180 top
R24  330  [R2010]  114.68,22.48 180 top
R25  442  [M0805]  46.23,189.36 90 top
R26  442  [M0805]  138.05,189.36 90 top
R27  442  [M0805]  56.01,199.14 90 top
R28  442  [M0805]  147.83,199.14 90 top
R29  1k  [M0805]  89.89,40.75 0 top
R30  1k  [M0805]  89.89,27.75 0 top
R31  330  [R2010]  102.67,35.73 180 top
R32  330  [R2010]  102.67,22.48 180 top
R33  1k  [M0805]  77.87,40.75 0 top
R34  1k  [M0805]  77.87,27.75 0 top
R35  442  [M0805]  56.01,178.56 90 top
R36  442  [M0805]  147.83,178.56 90 top
R37  442  [M0805]  46.23,210.95 90 top
R38  442  [M0805]  138.05,210.95 90 top
R39  330  [R2010]  90.4,35.73 180 top
R40  330  [R2010]  90.4,22.48 180 top
R41  1k  [M0805]  66.11,41 0 top
R42  1k  [M0805]  65.6,28 0 top
R43  330  [R2010]  78.38,35.73 180 top
R44  330  [R2010]  78.38,22.48 180 top
R45  1k  [M0805]  53.59,41 0 top
R46  1k  [M0805]  53.59,28 0 top
R47  442  [M0805]  76.83,178.56 90 top
R48  442  [M0805]  168.66,178.56 90 top
R49  442  [M0805]  67.06,210.95 90 top
R50  442  [M0805]  158.88,210.95 90 top
R51  1M  [M0805]  23.62,68.2 180 top
R52  1M  [M0805]  23.62,83.57 180 top
R53  1M  [M0805]  23.62,99.19 180 top
R54  1M  [M0805]  23.62,110.74 180 top
R55  330  [R2010]  66.11,35.98 180 top
R56  330  [R2010]  66.36,22.73 180 top
R57  1k  [M0805]  41.32,41 0 top
R58  1k  [M0805]  41.32,28 0 top
R59  1M  [M0805]  23.62,56.9 180 top
R60  1M  [M0805]  23.62,76.07 180 top
R61  1M  [M0805]  23.62,87.76 180 top
R62  1M  [M0805]  23.62,103 180 top
R63  442  [M0805]  28.57,70.1 180 top
R64  442  [M0805]  28.57,85.46 180 top
R65  442  [M0805]  28.57,101.08 180 top
R66  442  [M0805]  28.57,112.64 180 top
R67  442  [M0805]  67.06,189.36 90 top
R68  442  [M0805]  158.88,189.36 90 top
R69  442  [M0805]  76.83,199.14 90 top
R70  442  [M0805]  168.66,199.14 90 top
R71  442  [M0805]  28.57,58.67 180 top
R72  442  [M0805]  28.57,77.97 180 top
R73  442  [M0805]  28.57,89.65 180 top
R74  442  [M0805]  28.57,104.89 180 top
R75  330  [R2010]  54.09,35.98 180 top
R76  330  [R2010]  54.09,22.73 180 top
R77  1k  [M0805]  29.05,41 0 top
R78  1k  [M0805]  29.05,28 0 top
R79  330  [R2010]  41.82,35.98 180 top
R80  330  [R2010]  41.82,22.73 180 top
R81  1k  [M0805]  17.03,41 0 top
R82  1k  [M0805]  17.03,28 0 top
R83  442  [M0805]  87.88,189.36 90 top
R84  442  [M0805]  179.71,189.36 90 top
R85  442  [M0805]  97.66,199.14 90 top
R86  442  [M0805]  189.48,199.14 90 top
R87  330  [R2010]  29.55,35.98 180 top
R88  330  [R2010]  29.55,22.73 180 top
R89  1M  [M0805]  23.62,64.39 180 top
R90  1M  [M0805]  23.62,79.63 180 top
R91  1M  [M0805]  23.62,95.38 180 top
R92  1M  [M0805]  23.62,114.55 180 top
R93  1k  [M0805]  6.03,41 0 top
R94  1k  [M0805]  6.03,28 0 top
R95  1M  [M0805]  23.62,60.58 180 top
R96  1M  [M0805]  23.62,72.14 180 top
R97  1M  [M0805]  23.62,91.57 180 top
R98  1M  [M0805]  23.62,106.93 180 top
R99  442  [M0805]  28.57,66.29 180 top
R100  442  [M0805]  28.57,81.53 180 top
R101  442  [M0805]  28.57,97.27 180 top
R102  442  [M0805]  28.57,116.57 180 top
R103  442  [M0805]  97.66,178.56 90 top
R104  442  [M0805]  189.48,178.56 90 top
R105  442  [M0805]  87.88,210.95 90 top
R106  442  [M0805]  179.71,210.95 90 top
R107  442  [M0805]  28.57,62.48 180 top
R108  442  [M0805]  28.57,74.16 180 top
R109  442  [M0805]  28.57,93.46 180 top
R110  442  [M0805]  28.57,108.83 180 top
R111  330  [R2010]  17.28,35.98 180 top
R112  330  [R2010]  17.28,22.73 180 top
R113  49.9k  [M0805]  174.12,56.85 90 top
R114  60  [M0805]  174.12,52.12 90 top
R115  442  [M0805]  9.65,205.1 0 top
R116  10K  [M0805]  177.84,92.84 180 top
R117  10K  [M0805]  177.84,97.03 180 top
R118  10K  [M0805]  177.84,101.22 180 top
R119  10K  [M0805]  177.84,90.74 180 top
R120  10K  [M0805]  177.84,94.94 180 top
R121  10K  [M0805]  177.84,99.13 180 top
R122  301  [M0805]  116.27,167.6 180 top
R123  0  [M0805]  106.43,166.37 90 top
R124  301  [M0805]  116.26,165.3 180 top
R125  1M  [M0805]  104.27,166.37 270 top
R126  8k  [M0805]  91.94,163.33 90 top
R127  2k  [M0805]  94.33,163.31 90 top
R128  2k  [M0805]  86.73,158.83 90 top
R129  330  [M0805]  179.76,129.06 90 top
R130  1k  [M0805]  89.23,158.83 90 top
R131  1k  [M0805]  188.9,106.05 270 top
R132  330  [M0805]  183.87,107.73 270 top
R133  330  [M0805]  188.75,112.49 90 top
R134  301  [M0805]  83.94,155.33 0 top
R135  1k  [M0805]  81.94,150.33 0 top
R136  1k  [M0805]  85.44,149.33 90 top
R137  330  [M0805]  173.59,129.06 90 top
R138  8k  [M0805]  185.93,128.81 90 top
R139  1M  [R1206]  162.69,168.53 0 top
R140  12.7k  [R0805]  168.53,168.53 180 top
RA1  744C083101JP  [5131(744SERIES)]  105.94,140.27 180 top
RA2  744C083101JP  [5131(744SERIES)]  100.09,140.53 180 top
T1  4POLE_PLUGIN_TERMINAL_SIDE  [4POLE_3.5MM_TERMINAL_SIDE]  4,80.7 90 top
T2  4POLE_PLUGIN_TERMINAL_SIDE  [4POLE_3.5MM_TERMINAL_SIDE]  4,102.7 90 top
T3  4POLE_PLUGIN_TERMINAL_SIDE  [4POLE_3.5MM_TERMINAL_SIDE]  4,124.7 90 top
T4  4POLE_PLUGIN_TERMINAL_SIDE  [4POLE_3.5MM_TERMINAL_SIDE]  4,58.7 90 top
T5  8POLE_PLUGIN_TERMINAL_SIDE  [8POLE_3.5MM_TERMINAL_SIDE]  30.61,237.1 0 top
T6  8POLE_PLUGIN_TERMINAL_SIDE  [8POLE_3.5MM_TERMINAL_SIDE]  72.26,237.1 0 top
T7  8POLE_PLUGIN_TERMINAL_SIDE  [8POLE_3.5MM_TERMINAL_SIDE]  122.43,237.1 0 top
T8  8POLE_PLUGIN_TERMINAL_SIDE  [8POLE_3.5MM_TERMINAL_SIDE]  164.08,237.1 0 top
T9  6POLE_PLUGIN_TERMINAL_SIDE  [6POLE_3.5MM_TERMINAL_SIDE]  132.68,4 180 top
T10  6POLE_PLUGIN_TERMINAL_SIDE  [6POLE_3.5MM_TERMINAL_SIDE]  97.65,4 180 top
T11  6POLE_PLUGIN_TERMINAL_SIDE  [6POLE_3.5MM_TERMINAL_SIDE]  61.09,4 180 top
T12  6POLE_PLUGIN_TERMINAL_SIDE  [6POLE_3.5MM_TERMINAL_SIDE]  24.03,4 180 top
T13  4POLE_PLUGIN_TERMINAL_TOP  [4POLE_3.5MM_TERMINAL_TOP]  12,58.7 90 top
T14  4POLE_PLUGIN_TERMINAL_TOP  [4POLE_3.5MM_TERMINAL_TOP]  12,80.7 90 top
T15  4POLE_PLUGIN_TERMINAL_TOP  [4POLE_3.5MM_TERMINAL_TOP]  12,102.7 90 top
T16  4POLE_PLUGIN_TERMINAL_TOP  [4POLE_3.5MM_TERMINAL_TOP]  12,124.7 90 top
T17  8POLE_PLUGIN_TERMINAL_TOP  [8POLE_3.5MM_TERMINAL_TOP]  30.61,229.1 0 top
T18  8POLE_PLUGIN_TERMINAL_TOP  [8POLE_3.5MM_TERMINAL_TOP]  72.26,229.1 0 top
T19  8POLE_PLUGIN_TERMINAL_TOP  [8POLE_3.5MM_TERMINAL_TOP]  122.43,229.1 0 top
T20  8POLE_PLUGIN_TERMINAL_TOP  [8POLE_3.5MM_TERMINAL_TOP]  164.08,229.1 0 top
T21  6POLE_PLUGIN_TERMINAL_TOP  [6POLE_3.5MM_TERMINAL_TOP]  132.68,12 180 top
T22  6POLE_PLUGIN_TERMINAL_TOP  [6POLE_3.5MM_TERMINAL_TOP]  97.65,12 180 top
T23  6POLE_PLUGIN_TERMINAL_TOP  [6POLE_3.5MM_TERMINAL_TOP]  61.09,12 180 top
T24  6POLE_PLUGIN_TERMINAL_TOP  [6POLE_3.5MM_TERMINAL_TOP]  24.03,12 180 top
U1  SPIDER-TLE7232GS  [SSOP24]  41.7,96 90 top
U2  CD74HC154M96  [SOIC24]  58.56,124.78 180 top
U3  SPIDER-TLE7232GS  [SSOP24]  41.7,81.7 90 top
U4  CD74HC154M96  [SOIC24]  37.87,124.78 180 top
U5  MODULAR_JACK  [44144]  194.94,51.8 90 top
U6  MCP2551_SOIC  [MCP_SOIC]  169.39,54.85 180 top
U8  ISO7241CDW  [SOIC16]  107.91,125.29 0 top
U9  TF-SD  [TF-SD]  187.19,95.83 270 top
U10  ADS1256  [SSOP28]  104.94,151.83 180 top
U11  STM32_CARRIERF407IGT6  [STM32_CARRIER]  100,79.75 180 top
U12  LM7805-T0220  [78XXS]  134.75,134.11 180 top
U13  ISO7241CDW  [SOIC16]  89.98,125.27 0 top
U14  LM1086-3.3  [317TS]  144.27,124.71 0 top
U15  LM35  [TO-92]  98.21,230.64 180 top
U16  VALOR_PM6045  [DIL24(4PIN)]  160.75,127.63 90 top
U17  LTC6655BHLS8-2.5  [CLCC8]  143.13,153.42 180 top
U18  7404MTCX  [TSSOP14]  25.64,124.65 90 top
U$1  [TENKIV_INFO_BLOCK]  27.94,50.67 0 top
Y1  HCM49-7.680MABJ-UT  [HCM49]  90.28,137.26 0 top

## Library data of the parts
2.5V +3.3VA +5VA = other; MF: VISHAY/SPECTRO; MPN: 006-1-0; OC_NEWARK: 20M1633
5V 5V-1 12V DGND = solpad; OC_NEWARK: unknown
+9VA ADC_CS ADC_DRDY ADC_RESET ADC_SYNC JP5 JP7 RA2 U5 U6 U9 U11 U13 = Tenkiv TenDAQ
ADC_CLK GPO_CLK GPO_CS = other; MF: KEYSTONE ELECTR; MPN: 5004; OC_NEWARK: 52F7281
ADC_MISO GND(ADC) GPO_MISO = other; MF: KEYSTONE ELECTR; MPN: 5001; OC_NEWARK: 52F7278
ADC_MOSI GPO_MOSI = other; MF: KEYSTONE ELECTR; MPN: 5002; OC_NEWARK: 52F7279
AIN1.1 AIN1.2 AIN2.1 AIN2.2 AIN3.1 AIN3.2 AIN4.1 AIN4.2 AIN5.1 AIN5.2 AIN6.1 AIN6.2 AIN7.1 AIN7.2 AIN8.1 AIN8.2 AIN9.1 AIN9.2 AIN10.1 AIN10.2 AIN11.1 AIN11.2 AIN12.1 AIN12.2 AIN13.1 AIN13.2 AIN14.1 AIN14.2 AIN15.1 AIN15.2 AIN16.1 AIN16.2 AIN17.1 AIN17.2 AIN18.1 AIN18.2 AIN19.1 AIN19.2 AIN20.1 AIN20.2 AIN21.1 AIN21.2 AIN22.1 AIN22.2 AIN23.1 AIN23.2 AIN24.1 AIN24.2 AIN25.1 AIN25.2 AIN26.1 AIN26.2 AIN27.1 AIN27.2 AIN28.1 AIN28.2 AIN29.1 AIN29.2 AIN30.1 AIN30.2 AIN31.1 AIN31.2 AIN32.1 AIN32.2 AIN33.1 AIN33.2 = Tenkiv TekDAQC; MPN: CPC1025N; OC_NEWARK: 03M7311
C1-C39 C42 C43 C46-C52 C56-C58 C60-C62 C66-C69 C72 C73 = rcl; MPN: MC0805F105Z160CT; OC_NEWARK: 06R3932
C40 C54 C55 C74 R140 = rcl
C41 C75 = rcl; DIGIKEY#: 399-10158-1-ND; MFG: Kemet; MFG#: T491C106K020AT7280
C44 = Tenkiv TenDAQ; MFG: Wima; MFG#: SMDTD04470YA00KS00; NEWARK#: 46T6926
C53 C70 = rcl; DIGIKEY#: 495-2204-1-ND; MFG: Kemet; MFG#: T491A156M010AT
C63 = adafruit; MPN: MC0805F105Z160CT; OC_NEWARK: 06R3932
C64 C65 = rcl; MPN: MC0805N180J500CT; OC_NEWARK: 06R4039
C71 = rcl; MPN: MC0805F475Z100CT; OC_NEWARK: 06R3978
C76 U17 U18 U$1 = Tenkiv TekDAQC
D1-D30 D39-D46 D48-D51 D56 D57 D62-D66 D69-D71 = led; OC_NEWARK: unknown
D31-D38 D52-D55 D58-D61 D67 D68 = led
D47 = other
D72-D74 = diode
DMUX1-DMUX5 = other; MF: KEYSTONE ELECTR; MPN: 5003; OC_NEWARK: 52F7280
DRILEGEND = drilegend
GPI1-GPI24 = other; MPN: PC123X2YUP0F; OC_NEWARK: 14N9511
JP1 = jumper; MF: TYCO ELECTRONICS; MPN: 3-644456-3; OC_NEWARK: 52K3600
JP2-JP4 JP6 = pinhead
JP8 = Tenkiv TekDAQC; DIGIKEY#: 952-1922-ND; MFG: Harwin; MFG#: M20-8760342
L1 = Tenkiv TenDAQ; DIGIKEY#: DR331-475BECT-ND; MFG#: DR331-475BE
R1-R50 R55-R58 R67-R70 R75-R88 R93 R94 R103-R106 R111 R112 R115 R122-R129 R133 R134 R137 R138 = resistor; MF: Multicomp Passives; MPN: MC0805WAF1002T5E-TC; OC_NEWARK: 58K4692
R51-R54 R59-R66 R71-R74 R89-R92 R95-R102 R107-R110 R113 R114 R116-R121 R131 R132 = resistor
R130 R135 R136 = resistor; MPN: MCPWR05FTEW1001; OC_NEWARK: 43T5414
R139 = rcl; DIGIKEY#: HVC1206T1004JETCT-ND; MFG: Ohmite; MFG#: HVC1206T1004JET
RA1 = tenkiv; OC_NEWARK: unknown
T1-T24 = Tenkiv TekDAQC; OC_NEWARK: unknown
U1 U3 = other; OC_NEWARK: unknown
U2 U4 = other; MF: TEXAS INSTRUMENTS; MPN: CD74HC154M96; OC_NEWARK: 05B6103
U8 = other; MPN: ISO7241CDW; OC_NEWARK: 73M3155
U10 = tenkiv; MPN: ADS1256IDBTG4; OC_NEWARK: 12M8267
U12 = v-reg
U14 = v-reg; DIGIKEY#: LM1086IT-3.3/NOPB-ND; MFG: Texas Instruments; MFG#: LM1086IT-3.3/NOPB
U15 = other; MF: NATIONAL SEMICONDUCTOR; MPN: LM35CAZ/NOPB; OC_NEWARK: 41K4844
U16 = Tenkiv TenDAQ; OC_NEWARK: unknown
Y1 = crystal; OC_NEWARK: unknown